# EAGLE board Level Shift (EAGLE 9.1.2)
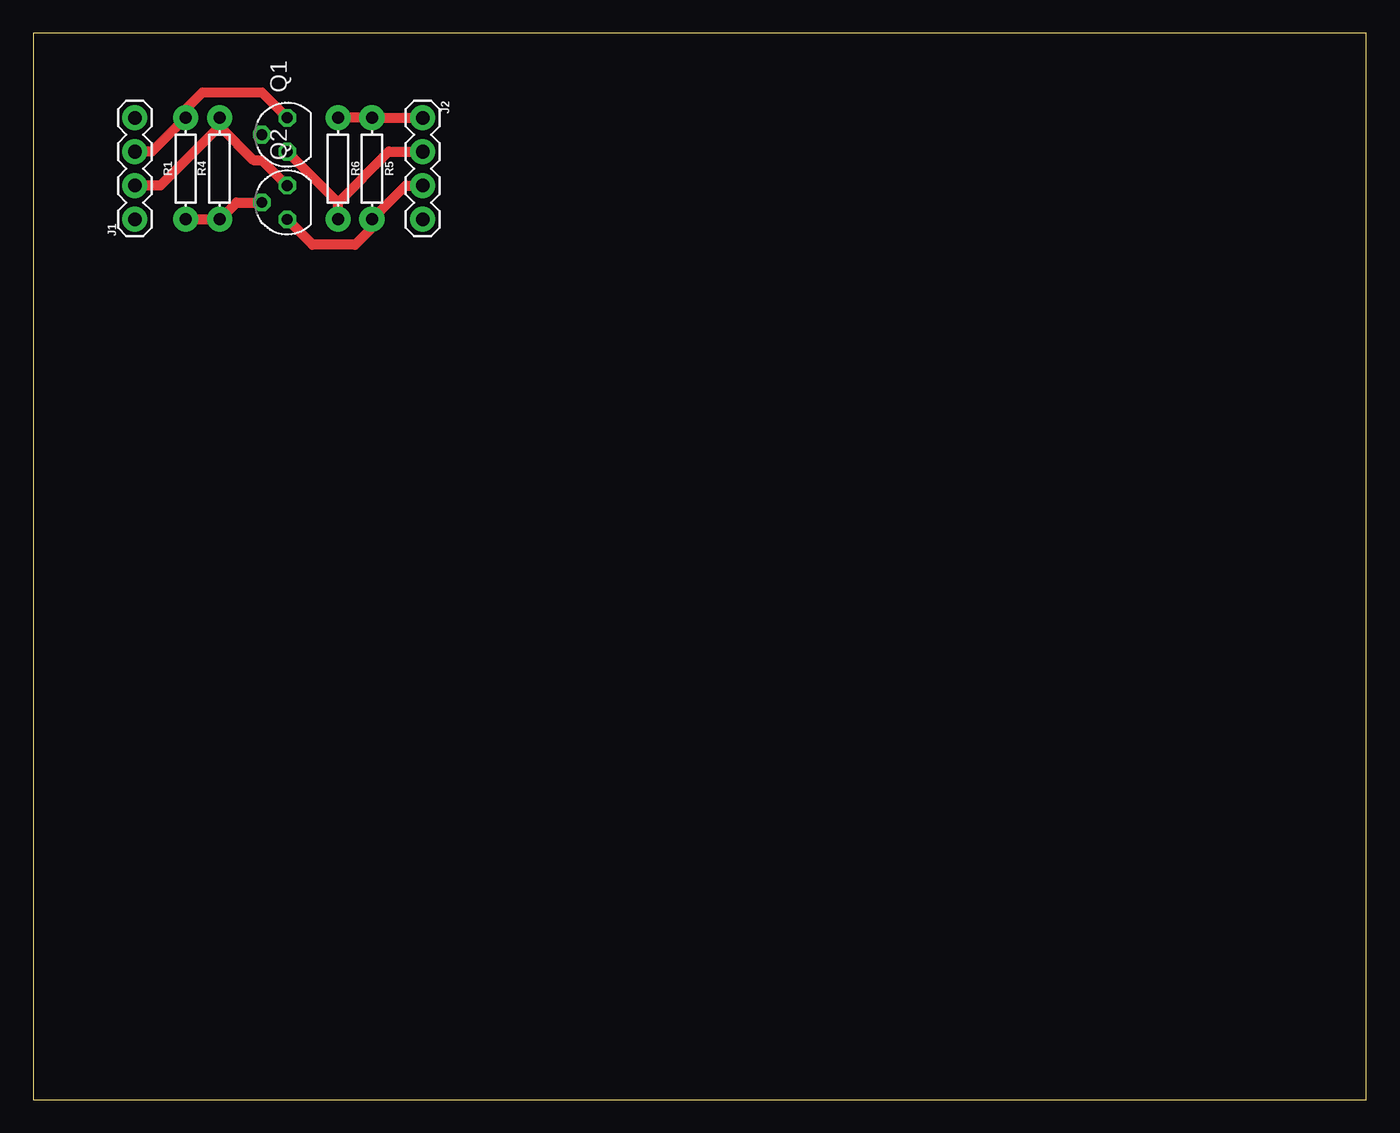
[diagram p0: board, top side]
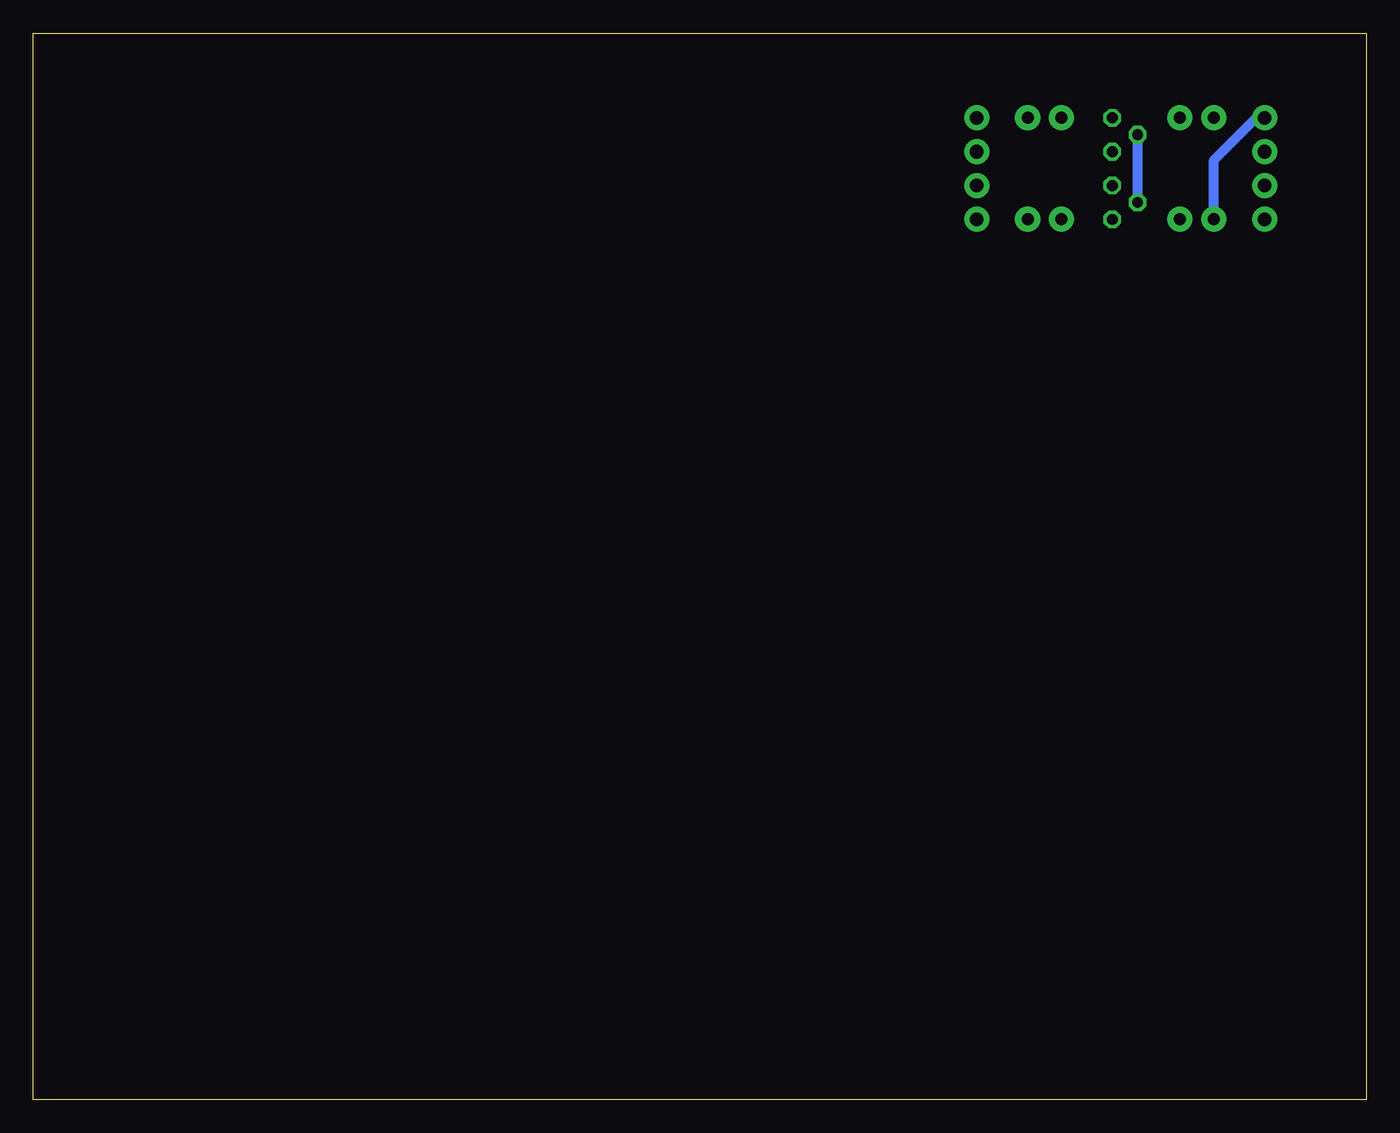
[diagram p1: board, bottom side, seen from below]

Size 100 x 80 mm. Coordinates in mm from the lower left corner, seen from the top.
Outline: 0,0 100,0 100,80 0,80 0,0
Copper layers (1*16): Top 0.035mm / dielectric 1.5mm / Bottom 0.035mm
Design rules "default": minimum track width 6mil, minimum drill 0.35mm, track to track 6mil, track to pad 6mil, pad to pad 6mil, via to via 6mil, smd to smd 6mil, copper to edge 40mil, drill to drill 6mil, minimum pad ring 10mil, minimum via ring 8mil, stop-mask expansion 4mil, vias tented up to drill 0mil, thermal gap 10mil
Net classes: 0 default: width 0.762 mm, drill 0.762 mm, clearance 0.508 mm

## Footprints (pad centres in the part's own frame; a part is rotated, then mirrored left to right if it is on the bottom)
1X04 = drill 1.016 pad 1.88: 1 0,0; 2 2.54,0; 3 5.08,0; 4 7.62,0
SOT54E = drill 0.813 octagon: D -1.27,0; G 0,1.905; S 1.27,0
AXIAL-0.3 = drill 0.9 pad 1.88: P$1 -3.81,0; P$2 3.81,0

## Placement (x,y rotation side)
J1  [1X04]  7.62,66.04 90 top
J2  [1X04]  29.21,73.66 270 top
Q1  BS170  [SOT54E]  19.05,72.39 90 top
Q2  BS170  [SOT54E]  19.05,67.31 90 top
R1  1k  [AXIAL-0.3]  11.43,69.85 90 top
R4  1k  [AXIAL-0.3]  13.97,69.85 90 top
R5  1k  [AXIAL-0.3]  25.4,69.85 270 top
R6  1k  [AXIAL-0.3]  22.86,69.85 270 top

## Library data of the parts
J1 J2 = SparkFun-Connectors; PROD_ID: CONN-09696
Q1 Q2 = transistor-small-signal
R1 R4-R6 = SparkFun-Resistors; PROD_ID: RES-12182

## Nets
3V: J1.4 Q1.G Q2.G R1.P$1 R4.P$1
5V: J2.1 R5.P$1 R6.P$1
N$2: J1.3 Q1.S R1.P$2
N$3: J2.2 Q1.D R6.P$2
N$4: J1.2 Q2.S R4.P$2
N$5: J2.3 Q2.D R5.P$2

## Tracks (layer width: path | path; a pad name or v marks a point on that pad's centre or on a via)
3V
  Top 0.762: Q2.G 15.24,67.31 R4.P$1 R1.P$1
  Bottom 0.762: Q2.G Q1.G | J1.4 8.26,73.66 11.43,70.48 R1.P$1
5V
  Top 0.762: R6.P$1 R5.P$1 J2.1
N$2
  Top 0.762: Q1.S 17.14,75.56 12.7,75.56 11.43,74.3 R1.P$2 8.89,71.12 J1.3
N$3
  Top 0.762: 22.86,67.31 Q1.D | R6.P$2 22.86,67.31 | J2.2 26.67,71.12 22.86,67.31
N$4
  Top 0.762: Q2.S 17.14,70.48 16.51,70.48 13.97,73.03 | R4.P$2 13.97,73.03 | J1.2 9.53,68.58 13.97,73.03
N$5
  Top 0.762: Q2.D 20.95,64.14 24.13,64.14 25.4,65.41 R5.P$2 27.94,68.58 J2.3